# EAGLE board PCB (EAGLE 9.7.0)
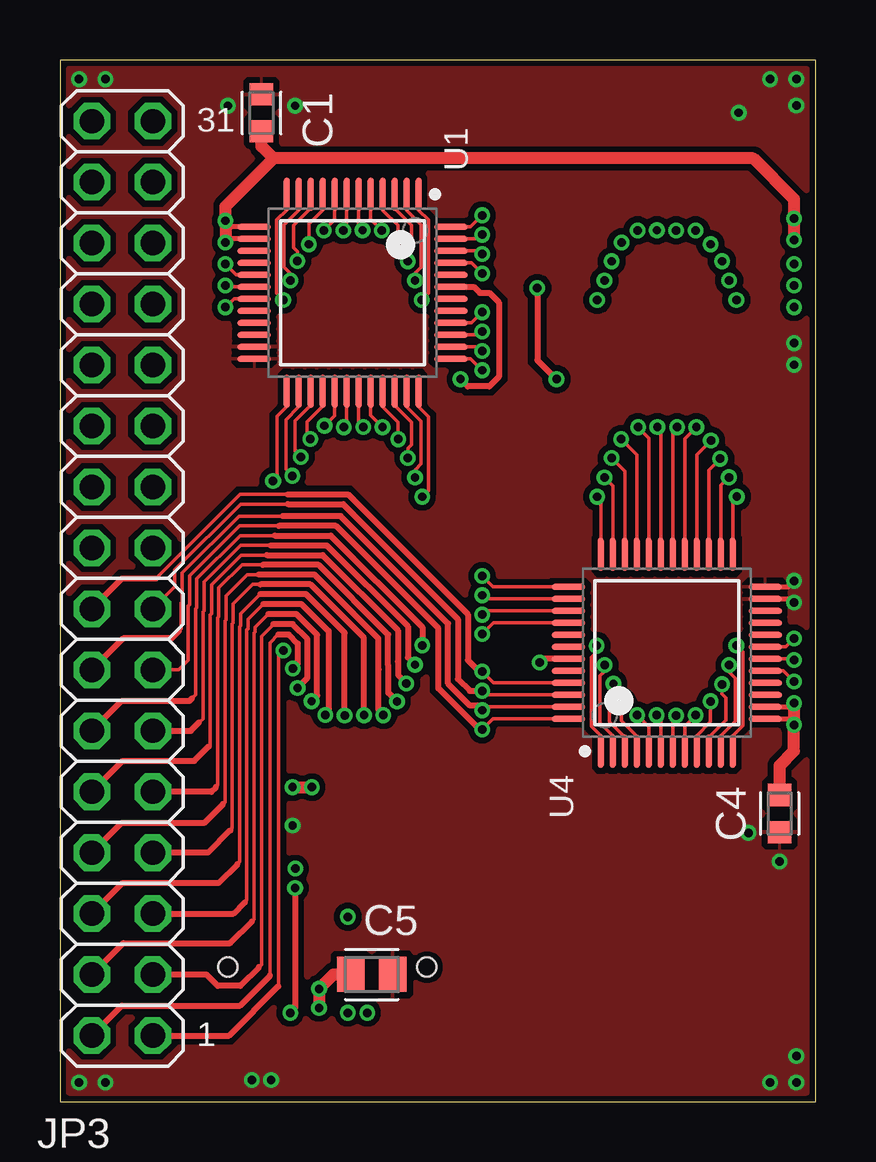
[diagram p0: board, top side]
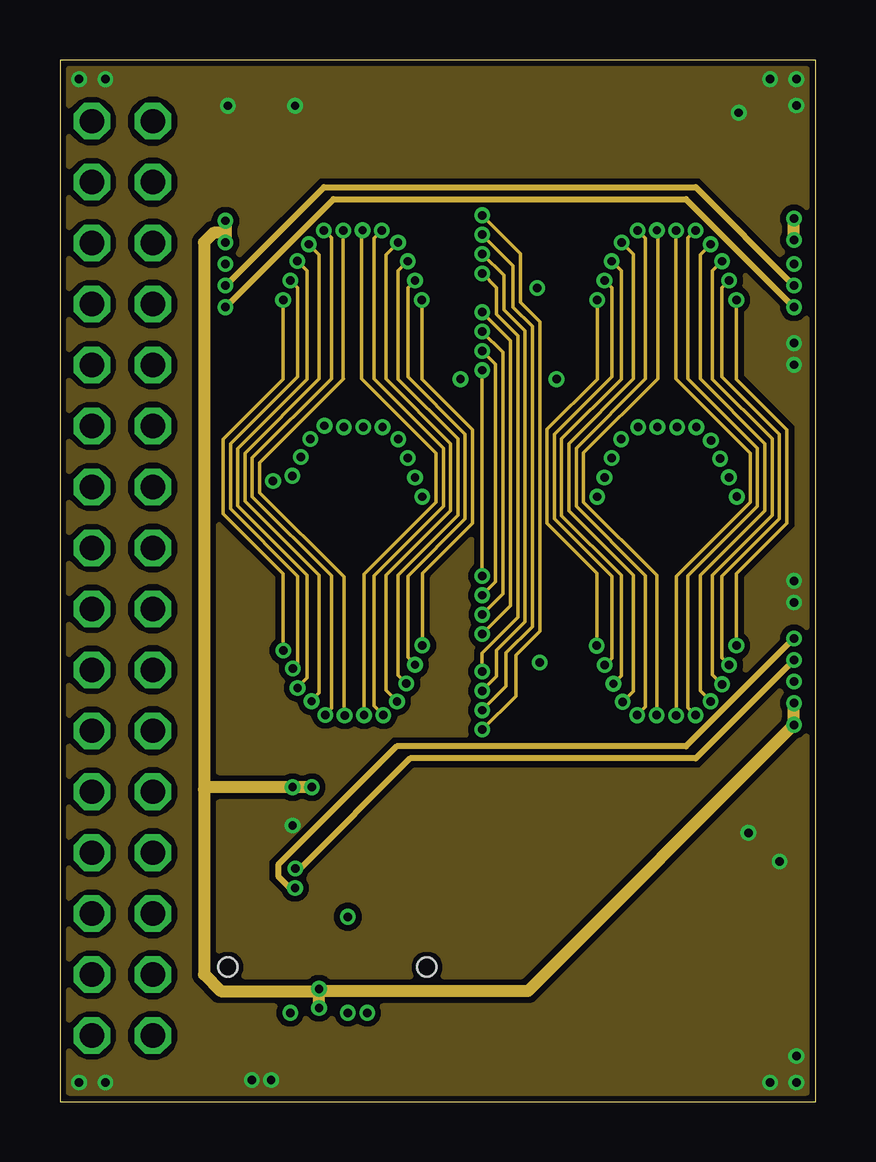
[diagram p1: board, inner layer Route2]
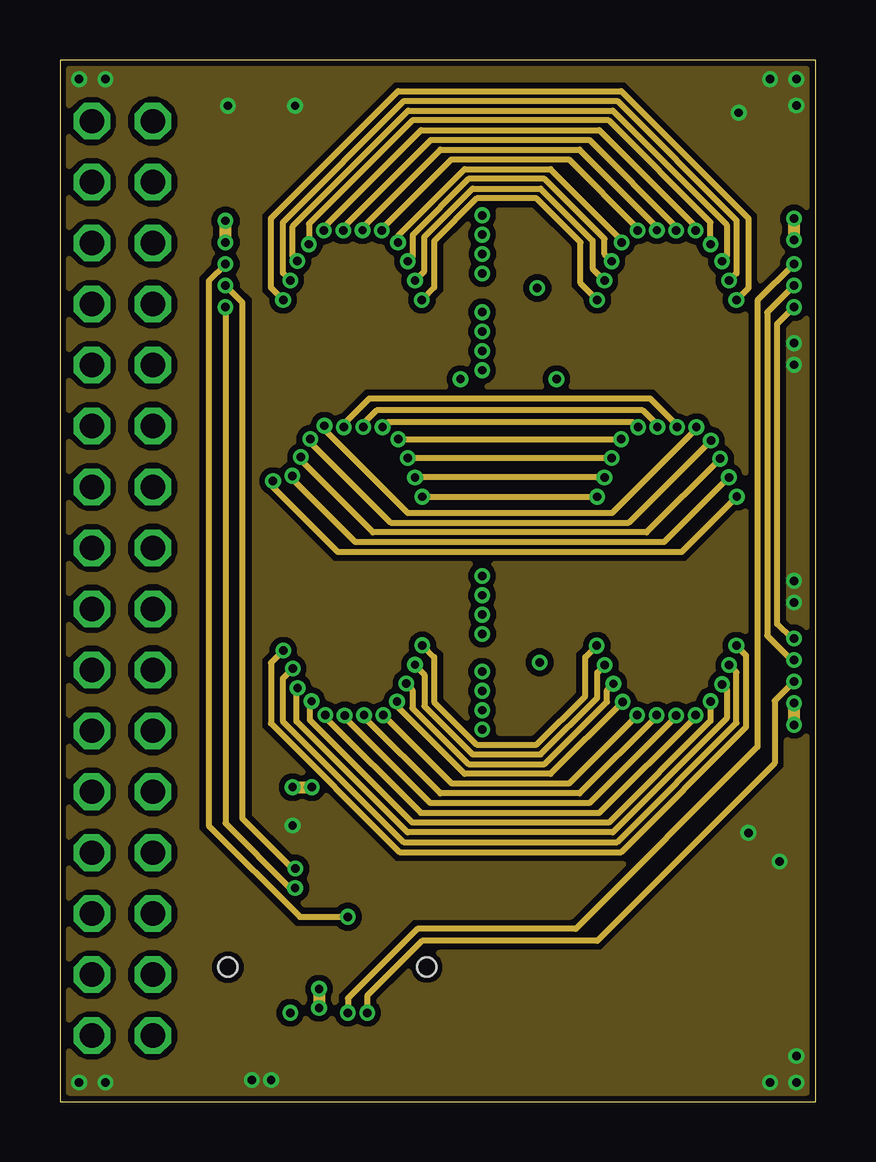
[diagram p2: board, inner layer Route15]
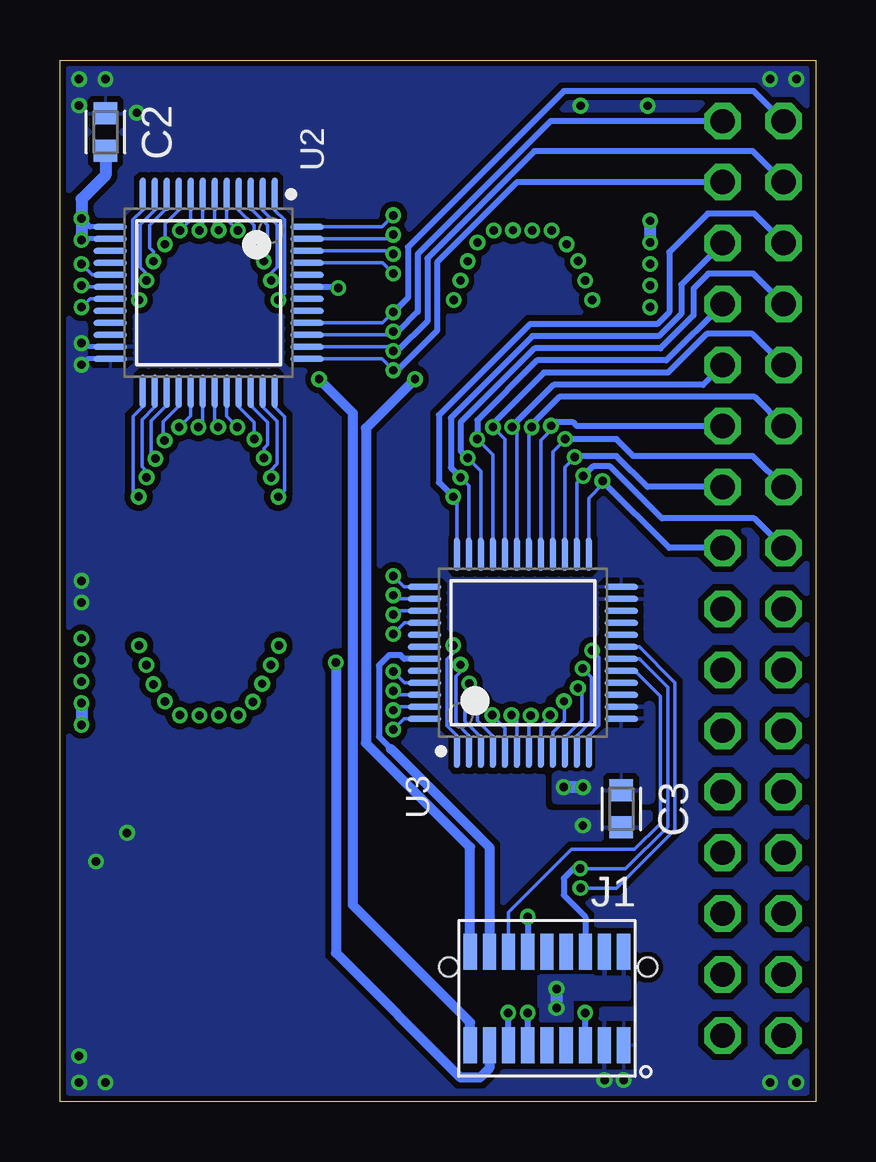
[diagram p3: board, bottom side, seen from below]

Size 31.5 x 43.4 mm. Coordinates in mm from the lower left corner, seen from the top.
Outline: 0,0 31.5,0 31.5,43.4 0,43.4 0,0
Copper layers (1+2*15+16): Top 0.035mm / dielectric 1.5mm / Route2 0.035mm / dielectric 0.15mm / Route15 0.035mm / dielectric 0.2mm / Bottom 0.035mm
Design rules "default *": minimum track width 6mil, minimum drill 0.35mm, track to track 6mil, track to pad 6mil, pad to pad 6mil, via to via 6mil, smd to smd 6mil, copper to edge 10mil, drill to drill 6mil, minimum pad ring 10mil, minimum via ring 6mil, stop-mask expansion 3mil, vias tented up to drill 15mil, thermal gap 10mil

## Footprints (pad centres in the part's own frame; a part is rotated, then mirrored left to right if it is on the bottom)
CAPC1608X85 = smd 0.921 x 0.97: 1 -0.775,0; 2 0.775,0
CAPC2012X110 = smd 1.165 x 1.465: 1 -0.875,0; 2 0.875,0
MOLEX_52465-1870 = smd 0.55 x 1.5: P$1 -3.2,1.95; P$2 -3.2,-1.95; P$3 -2.4,1.95; P$4 -2.4,-1.95; P$5 -1.6,1.95; P$6 -1.6,-1.95; P$7 -0.8,1.95; P$8 -0.8,-1.95; P$9 0,1.95; P$10 0,-1.95; P$11 0.8,1.95; P$12 0.8,-1.95; P$13 1.6,1.95; P$14 1.6,-1.95; P$15 2.4,1.95; P$16 2.4,-1.95; P$17 3.2,1.95; P$18 3.2,-1.95 | hole 0.8: -4.2,-1.3; 4.1,-1.3
2X16 = drill 1.016 octagon: 1 -19.05,-1.27; 2 -19.05,1.27; 3 -16.51,-1.27; 4 -16.51,1.27; 5 -13.97,-1.27; 6 -13.97,1.27; 7 -11.43,-1.27; 8 -11.43,1.27; 9 -8.89,-1.27; 10 -8.89,1.27; 11 -6.35,-1.27; 12 -6.35,1.27; 13 -3.81,-1.27; 14 -3.81,1.27; 15 -1.27,-1.27; 16 -1.27,1.27; 17 1.27,-1.27; 18 1.27,1.27; 19 3.81,-1.27; 20 3.81,1.27; 21 6.35,-1.27; 22 6.35,1.27; 23 8.89,-1.27; 24 8.89,1.27; 25 11.43,-1.27; 26 11.43,1.27; 27 13.97,-1.27; 28 13.97,1.27; 29 16.51,-1.27; 30 16.51,1.27; 31 19.05,-1.27; 32 19.05,1.27
ANALOG_DEVICES_ADG731BSUZ_0 = smd 1.4 x 0.25: 1 -4.1,2.75; 2 -4.1,2.25; 3 -4.1,1.75; 4 -4.1,1.25; 5 -4.1,0.75; 6 -4.1,0.25; 7 -4.1,-0.25; 8 -4.1,-0.75; 9 -4.1,-1.25; 10 -4.1,-1.75; 11 -4.1,-2.25; 12 -4.1,-2.75; 25 4.1,-2.75; 26 4.1,-2.25; 27 4.1,-1.75; 28 4.1,-1.25; 29 4.1,-0.75; 30 4.1,-0.25; 31 4.1,0.25; 32 4.1,0.75; 33 4.1,1.25; 34 4.1,1.75; 35 4.1,2.25; 36 4.1,2.75 | smd 0.25 x 1.4: 13 -2.75,-4.1; 14 -2.25,-4.1; 15 -1.75,-4.1; 16 -1.25,-4.1; 17 -0.75,-4.1; 18 -0.25,-4.1; 19 0.25,-4.1; 20 0.75,-4.1; 21 1.25,-4.1; 22 1.75,-4.1; 23 2.25,-4.1; 24 2.75,-4.1; 37 2.75,4.1; 38 2.25,4.1; 39 1.75,4.1; 40 1.25,4.1; 41 0.75,4.1; 42 0.25,4.1; 43 -0.25,4.1; 44 -0.75,4.1; 45 -1.25,4.1; 46 -1.75,4.1; 47 -2.25,4.1; 48 -2.75,4.1

## Placement (x,y rotation side)
C1  0.1uF  [CAPC1608X85]  8.4,41.2 270 top
C2  0.1uF  [CAPC1608X85]  29.6,40.4 270 bottom
C3  0.1uF  [CAPC1608X85]  8.1,12.2 90 bottom
C4  0.1uF  [CAPC1608X85]  30,12 90 top
C5  10uF  [CAPC2012X110]  13,5.3 180 top
J1  MOLEX_52465-1870  [MOLEX_52465-1870]  11.2,4.3 180 bottom
JP3  PINHD-2X16  [2X16]  2.6,21.8 90 top
U1  ANALOG_DEVICES_ADG731BSUZANALOG_DEVICES_ADG731BSUZ_0_0  [ANALOG_DEVICES_ADG731BSUZ_0]  12.2,33.7 270 top
U2  ANALOG_DEVICES_ADG731BSUZANALOG_DEVICES_ADG731BSUZ_0_0  [ANALOG_DEVICES_ADG731BSUZ_0]  25.3,33.7 270 bottom
U3  ANALOG_DEVICES_ADG731BSUZANALOG_DEVICES_ADG731BSUZ_0_0  [ANALOG_DEVICES_ADG731BSUZ_0]  12.2,18.7 90 bottom
U4  ANALOG_DEVICES_ADG731BSUZANALOG_DEVICES_ADG731BSUZ_0_0  [ANALOG_DEVICES_ADG731BSUZ_0]  25.3,18.7 90 top

## Library data of the parts
C1-C5 = Capacitor; CATEGORY: Capacitor
J1 = Molex 52465-1870
JP3 = Connector
U1-U4 = Analog Devices - ADG731BSUZ; BANDWIDTH_HZ: 18M; CIIVA_IDS: 19300650; CODE__JEDEC: MS-026ABC; COMPONENT_LINK_1_DESCRIPTION: Manufacturer URL; COMPONENT_LINK_1_URL: http://www.analog.com/en/index.html; COMPONENT_LINK_3_DESCRIPTION: Package Specification; COMPONENT_LINK_3_URL: http://www.analog.com/static/imported-files/packages/470644706845302410119987SU48_7x7.pdf; DATASHEET: http://www.analog.com/static/imported-files/data_sheets/ADG725_731.pdf; DATASHEET_VERSION: Rev. A; FOOTPRINT_VARIANT_NAME_0: Level C; FOOTPRINT_VARIANT_NAME_1: Level B; FOOTPRINT_VARIANT_NAME_2: Level A; IMPORTED: yes; IMPORTED_FROM: vault; IMPORT_TS: 1521857462; MAX_ANALOG_SIGNAL_RANGE: Vss to Vdd; MF: Analog Devices; MOUNTING_TECHNOLOGY: Surface Mount; MPN: ADG731BSUZ; PACKAGE: SU-48; PACKAGE_DESCRIPTION: 48-Pin Thin Plastic Quad Flat Package, Body 7 x 7 mm, Pitch 0.5 mm; PACKING: Tray; PIN_0_0_39_INSIDE_EDGE: clock; PREFIX: U; RELEASE_DATE: 1391089390; RON_OHMS: 4; SUPPLY_V_GUAR_PERFORMANCE: Dual_(+/-2.5V), Single_(+3V), Single_(+5V); T_TRANSITION_S: 42n; VAULT_GUID: 76926279-8684-441A-80C4-6DFBDCC65274; VAULT_REVISION: 8C21F4D2-BBAB-4E50-B4EF-AC8EEE00B0BF

## Nets
+5V: C1.2 C2.2 C3.2 C4.2 C5.2 J1.P$2 J1.P$4 U1.13 U1.14 U2.13 U2.14 U3.13 U3.14 U4.13 U4.14
CS5: J1.P$14 U3.17
CS6: J1.P$12 U1.17
CS7: J1.P$13 U4.17
CS8: J1.P$11 U2.17
D1: J1.P$16 U3.43
D2: J1.P$18 U1.43
D3: J1.P$15 U4.43
D4: J1.P$17 U2.43
DAT: J1.P$6 U1.18 U2.18 U3.18 U4.18
GND: C1.1 C2.1 C3.1 C4.1 C5.1 J1.P$1 J1.P$3 U1.23 U1.24 U2.23 U2.24 U3.23 U3.24 U4.23 U4.24
S1: JP3.1 U1.12 U2.12 U3.12 U4.12
S2: JP3.2 U1.11 U2.11 U3.11 U4.11
S3: JP3.3 U1.10 U2.10 U3.10 U4.10
S4: JP3.4 U1.9 U2.9 U3.9 U4.9
S5: JP3.5 U1.8 U2.8 U3.8 U4.8
S6: JP3.6 U1.7 U2.7 U3.7 U4.7
S7: JP3.7 U1.6 U2.6 U3.6 U4.6
S8: JP3.8 U1.5 U2.5 U3.5 U4.5
S9: JP3.9 U1.4 U2.4 U3.4 U4.4
S10: JP3.10 U1.3 U2.3 U3.3 U4.3
S11: JP3.11 U1.2 U2.2 U3.2 U4.2
S12: JP3.12 U1.1 U2.1 U3.1 U4.1
S13: JP3.13 U1.48 U2.48 U3.48 U4.48
S14: JP3.14 U1.47 U2.47 U3.47 U4.47
S15: JP3.15 U1.46 U2.46 U3.46 U4.46
S16: JP3.16 U1.45 U2.45 U3.45 U4.45
S17: JP3.17 U1.25 U2.25 U3.25 U4.25
S18: JP3.18 U1.26 U2.26 U3.26 U4.26
S19: JP3.19 U1.27 U2.27 U3.27 U4.27
S20: JP3.20 U1.28 U2.28 U3.28 U4.28
S21: JP3.21 U1.29 U2.29 U3.29 U4.29
S22: JP3.22 U1.30 U2.30 U3.30 U4.30
S23: JP3.23 U1.31 U2.31 U3.31 U4.31
S24: JP3.24 U1.32 U2.32 U3.32 U4.32
S25: JP3.25 U1.33 U2.33 U3.33 U4.33
S26: JP3.26 U1.34 U2.34 U3.34 U4.34
S27: JP3.27 U1.35 U2.35 U3.35 U4.35
S28: JP3.28 U1.36 U2.36 U3.36 U4.36
S29: JP3.29 U1.37 U2.37 U3.37 U4.37
S30: JP3.30 U1.38 U2.38 U3.38 U4.38
S31: JP3.31 U1.39 U2.39 U3.39 U4.39
S32: JP3.32 U1.40 U2.40 U3.40 U4.40
SCLK: J1.P$5 U1.19 U2.19 U3.19 U4.19

## Tracks (layer width: path | path; a pad name or v marks a point on that pad's centre or on a via)
+5V  (via drill 0.35)
  Top 0.203: U1.14 7.05,35.95 v6.9,35.8 | U1.13 7.15,36.45 v6.9,36.7 | U4.14 30.45,16.45 v30.6,16.6 | U4.13 30.35,15.95 v30.6,15.7
  Top 0.508: 8.9,39.3 6.9,37.3 v6.9,36.7 v6.9,35.8 | 8.9,39.3 28.9,39.3 30.6,37.6 v30.6,36.8 v30.6,35.9 | C4.2 30,14 30.6,14.6 v30.6,15.7 v30.6,16.6 | v9.7,13.1 v10.5,13.1 | v10.8,3.9 v10.8,4.7 11.4,5.3 C5.2 | 8.9,39.3 8.4,39.8 C1.2
  Route2 0.508: v6.9,36.7 6.9,36.2 | 6.9,36.2 v6.9,35.8 | v30.6,16.6 v30.6,15.7 19.5,4.6 10.9,4.6 v10.8,4.7 | v30.6,35.9 v30.6,36.8 | v10.8,3.9 v10.8,4.7 | 6.9,36.2 6.4,36.2 6,35.8 6,13 | 6,13 6,5.3 6.7,4.6 10.7,4.6 v10.8,4.7 | v10.5,13.1 v9.7,13.1 6.1,13.1 6,13
  Route15 0.508: v6.9,35.8 v6.9,36.7 | v30.6,36.8 v30.6,35.9 | v30.6,16.6 v30.6,15.7 | v10.8,4.7 v10.8,3.9 | v9.7,13.1 v10.5,13.1
  Bottom 0.203: U2.14 30.55,35.95 v30.6,35.9 | U2.13 30.25,36.45 v30.6,36.8
  Bottom 0.508: C2.2 29.6,38.6 30.6,37.6 v30.6,36.8 v30.6,35.9 | v6.9,36.7 v6.9,35.8 | v30.6,16.6 v30.6,15.7 | v10.8,4.7 v10.8,3.9 | v9.7,13.1 v10.5,13.1
  pour Bottom: 11,12.4 11,16.7 6.7,16.7 6.7,12.4
  pour Bottom: 7.7,7 9.2,7 9.2,5.3 11.6,5.3 11.6,3.3 10.1,3.3 10.1,4.2 7.7,4.2
CS5
  Bottom 0.152: U3.17 7.53,17.95 6.47,16.9 6.47,11.59 7.54,10.51 10.17,10.51 12.8,7.89 J1.P$14
CS6  (via drill 0.35, 0.35 pad 0.55)
  Top 0.152: U1.17 7.35,34.45 v6.9,34.9
  Route15 0.254: v6.9,34.9 6.2,34.2 6.2,11.5 10,7.7 v12,7.7
  Bottom 0.254: v12,7.7 J1.P$12
CS7  (via drill 0.35, 0.35 pad 0.55)
  Top 0.152: v30.6,17.5 30.15,17.95 U4.17
  Route15 0.254: v30.6,17.5 29.8,16.7 29.8,14.1 22.4,6.7 15.1,6.7 12.81,4.41 v12.81,3.7
  Bottom 0.254: J1.P$13 v12.8,3.69 v12.81,3.7
CS8  (via drill 0.35, 0.35 pad 0.55)
  Route15 0.254: v30.6,34.9 29.08,33.38 29.08,14.78 21.5,7.2 14.9,7.2 12,4.3 v12,3.7
  Bottom 0.152: v30.6,34.9 30.15,34.45 U2.17
  Bottom 0.254: J1.P$11 v12,3.7
D1
  Bottom 0.254: U3.43 17.15,18.45 17.3,18.6 17.78,18.6 18.21,18.17 18.21,15.21 17.7,14.7
  Bottom 0.406: 17.7,14.7 13.6,10.6 J1.P$16
D2  (via drill 0.35)
  Top 0.254: U1.43 17.25,33.95 17.5,33.7 17.9,33.7 18.3,33.3 18.3,30.2 17.9,29.8 17,29.8 v16.7,30.1
  Bottom 0.406: v16.7,30.1 18.74,28.06 18.74,14.94 14.4,10.6 J1.P$18
D3  (via drill 0.35)
  Top 0.254: U4.43 20.15,18.45 v20,18.3
  Bottom 0.406: v20,18.3 20,6.2 14.8,1 14,1 13.6,1.4 J1.P$15
D4  (via drill 0.35)
  Top 0.254: v19.9,33.9 19.9,30.9 v20.7,30.1
  Bottom 0.254: U2.43 19.95,33.95 v19.9,33.9
  Bottom 0.406: v20.7,30.1 19.3,28.7 19.3,8.2 14.4,3.3 J1.P$17
DAT  (via drill 0.35, 0.35 pad 0.55)
  Top 0.152: U4.18 30.55,18.45 v30.6,18.4 | U1.18 6.95,33.95 v6.9,34
  Route2 0.254: v6.9,34 11,38.1 26.5,38.1 v30.6,34 | v30.6,18.4 26.5,14.3 14.6,14.3 10.01,9.71 v9.81,9.71
  Route15 0.254: v6.9,34 7.6,33.3 7.6,11.8 9.69,9.71 v9.81,9.71 | v30.6,34 29.49,32.89 29.49,19.41 30.5,18.4 v30.6,18.4
  Bottom 0.152: U2.18 30.55,33.95 v30.6,34 | U3.18 7.35,18.45 6.17,17.27 6.17,11.46 7.92,9.71 v9.81,9.71
  Bottom 0.254: v9.81,9.71 10.09,9.71 10.5,9.3 10.5,8.6 9.6,7.7 J1.P$6
GND  (via drill 0.35)
  Top 0.203: U4.23 30.45,20.95 v30.6,20.8 | U4.24 30.35,21.45 v30.6,21.7
  Bottom 0.203: U2.23 30.45,31.45 v30.6,31.6 | U2.24 30.35,30.95 v30.6,30.7
  other vias: 30,10 28.7,11.2 29.6,42.6 28.3,41.2 30.7,0.8 30.7,1.9 29.6,0.8 30.7,42.6 30.7,41.5 7,41.49 9.8,41.49 0.8,0.8 1.9,0.8 0.8,42.6 1.9,42.6 8,0.9 8.8,0.9 9.7,11.5
  pour Top (isolate 0.254, rank 2): 0,0 31.5,0 31.5,43.4 0,43.4
  pour Route2 (isolate 0.254): 0,0 31.5,0 31.5,43.4 0,43.4
  pour Route15 (isolate 0.254): 0,0 31.5,0 31.5,43.4 0,43.4
  pour Bottom (isolate 0.254, rank 2): 0,0 31.5,0 31.5,43.4 0,43.4
S1  (via drill 0.35 pad 0.55)
  Top 0.152: U1.12 9.45,37.15 9.04,36.74 9.04,33.67 v9.3,33.41 | U4.12 28.05,15.25 28.46,15.66 28.46,18.74 v28.2,19 | v9.31,18.79 9.11,18.59 9.11,4.81 9.1,4.8
  Top 0.254: JP3.1 7.05,2.75 9.1,4.8
  Route2 0.152: v28.2,33.4 28.2,30.1 30.3,28 30.3,24.1 28.2,22 v28.2,19 | v9.3,33.41 v9.3,33.4 9.3,30.1 6.8,27.6 6.8,24.5 9.31,21.99 v9.31,18.79
  Route15 0.254: v9.3,33.41 8.8,33.91 8.8,36.8 14.1,42.1 23.4,42.1 28.7,36.8 28.7,33.9 v28.2,33.4 | v28.2,19 28.61,18.59 28.61,15.61 23.4,10.4 14.16,10.4 8.8,15.76 8.8,18.28 v9.31,18.79
  Bottom 0.152: U3.12 9.45,15.25 9.03,15.67 9.03,18.51 v9.31,18.79 | U2.12 28.05,37.15 28.46,36.74 28.46,33.66 v28.2,33.4
S2  (via drill 0.35 pad 0.55)
  Top 0.152: U1.11 9.95,37.15 9.34,36.54 9.34,34.77 9.6,34.51 v9.6,34.21 | U4.11 27.55,15.25 28.16,15.86 28.16,17.63 27.9,17.89 v27.9,18.19 | 8.75,5.25 8.75,19.12 9.1,19.47
  Top 0.254: 9.1,19.47 9.53,19.47 9.92,19.08 9.92,18.26 v9.7,18.05 | JP3.2 2.58,4 7.5,4 8.75,5.25
  Route2 0.152: v9.6,34.21 9.9,33.91 9.9,30.2 7.11,27.41 7.11,24.69 9.9,21.9 9.9,18.3 9.7,18.1 v9.7,18.05 | v27.9,18.19 27.6,18.49 27.6,21.9 29.99,24.3 29.99,27.8 27.6,30.2 27.6,33.91 v27.9,34.21
  Route15 0.254: v27.9,18.19 28.21,17.89 28.21,15.78 23.23,10.81 14.33,10.81 9.28,15.85 9.28,17.62 v9.7,18.05 | v9.6,34.21 9.29,34.52 9.29,36.64 14.35,41.69 23.23,41.69 28.21,36.72 28.21,34.51 v27.9,34.21
  Bottom 0.152: U3.11 9.95,15.25 9.33,15.87 9.33,17.67 v9.7,18.05 | U2.11 27.55,37.15 28.16,36.54 28.16,34.77 27.9,34.51 v27.9,34.21
S3  (via drill 0.35 pad 0.55)
  Top 0.152: U1.10 10.45,37.22 9.74,36.51 9.74,35.57 9.9,35.41 v9.9,35.02 | U4.10 27.05,15.18 27.76,15.89 27.76,16.83 27.6,16.99 v27.6,17.39 | 8.9,19.9 8.4,19.4 8.4,5.7 8.3,5.6
  Top 0.254: 8.9,19.9 9.7,19.9 10.32,19.28 10.32,17.65 v9.91,17.24 | 8.9,19.9 | JP3.3 6.11,5.29 6.58,4.82 7.52,4.82 8.3,5.6
  Route2 0.152: v9.9,35.02 v9.9,35.01 10.3,34.61 10.3,30.11 7.41,27.21 7.41,24.82 10.3,21.93 10.3,17.66 9.91,17.27 v9.91,17.24 | v27.6,17.39 27.2,17.79 27.2,21.93 29.69,24.42 29.69,27.61 27.2,30.11 27.2,34.61 v27.6,35.01
  Route15 0.254: v27.6,17.39 27.8,17.19 27.8,15.97 23.05,11.21 14.5,11.21 9.86,15.84 9.86,17.2 v9.91,17.24 | v9.9,35.02 9.7,35.22 9.7,36.47 14.52,41.29 23.05,41.29 27.8,36.53 27.8,35.21 v27.6,35.01
  Bottom 0.152: U3.10 10.45,15.18 9.74,15.89 9.74,17.07 v9.91,17.24 | U2.10 27.05,37.22 27.76,36.51 27.76,35.57 27.6,35.41 v27.6,35.01
S4  (via drill 0.35 pad 0.55)
  Top 0.152: U1.9 10.95,37.15 10.38,36.58 v10.38,35.72 | U4.9 26.55,15.25 27.12,15.82 v27.12,16.68 | 8.69,20.32 8.14,19.77 8.14,19.57 8.1,19.53 8.1,7.59 8,7.5
  Top 0.254: 8.69,20.32 9.86,20.32 10.73,19.45 10.73,16.92 v10.49,16.68 | JP3.4 2.64,6.6 7.1,6.6 8,7.5
  Route2 0.152: v10.38,35.72 10.81,35.29 10.81,30.11 7.72,27.02 7.72,25.02 10.81,21.92 10.81,17.03 10.49,16.71 v10.49,16.68 | v27.12,16.68 26.69,17.11 26.69,21.92 29.39,24.62 29.39,27.41 26.69,30.11 26.69,35.29 v27.12,35.72
  Route15 0.254: v27.12,16.68 27.12,15.86 22.88,11.62 14.69,11.62 10.42,15.89 10.42,16.61 v10.49,16.68 | v10.38,35.72 10.38,36.57 14.69,40.88 22.88,40.88 27.12,36.64 v27.12,35.72
  Bottom 0.152: U2.9 26.55,37.15 27.12,36.58 v27.12,35.72 | U3.9 10.95,15.4 10.47,15.87 10.47,16.66 v10.49,16.68
S5  (via drill 0.35 pad 0.55)
  Top 0.152: U1.8 11.45,36.75 v11,36.3 | U4.8 26.05,15.65 v26.5,16.1 | 8.47,20.73 7.84,20.1 7.84,19.7 7.79,19.65 7.79,8.39 7.7,8.3
  Top 0.254: 8.47,20.73 10.07,20.73 11.2,19.6 11.2,16.25 v11.06,16.11 | JP3.5 7.23,7.83 7.7,8.3
  Route2 0.152: v26.5,16.1 26.19,16.41 26.19,21.92 29.08,24.81 29.08,27.22 26.19,30.11 26.19,35.99 v26.5,36.3 | v11,36.3 11.31,35.99 11.31,30.11 8.02,26.82 8.02,25.21 11.31,21.92 11.31,16.39 11.06,16.14 v11.06,16.11
  Route15 0.254: v26.5,16.1 26.5,16.04 22.48,12.03 15.05,12.03 11.06,16.01 v11.06,16.11 | v11,36.3 11,36.42 15.05,40.47 22.48,40.47 26.5,36.46 v26.5,36.3
  Bottom 0.152: U2.8 26.05,36.75 v26.5,36.3 | U3.8 11.45,15.68 11.06,16.07 v11.06,16.11
S6  (via drill 0.35 pad 0.55)
  Top 0.152: U1.7 11.95,36.44 v11.81,36.3 | U4.7 25.55,15.95 v25.69,16.09 | 8.35,21.15 7.53,20.33 7.53,19.83 7.49,19.78 7.49,9.99 7.4,9.9
  Top 0.254: v11.87,16.09 11.87,19.53 10.25,21.15 8.35,21.15 | JP3.6 2.6,9.1 6.6,9.1 7.4,9.9
  Route2 0.152: v25.69,16.09 25.69,21.89 28.78,24.98 28.78,27.02 25.68,30.12 25.68,36.29 v25.69,36.3 | v11.81,36.3 11.81,30.13 11.82,30.12 8.32,26.62 8.32,25.37 11.84,21.86 11.84,16.12 v11.87,16.09
  Route15 0.254: v25.69,16.09 25.69,16.06 22.07,12.43 15.45,12.43 11.87,16.02 v11.87,16.09 | v11.81,36.3 11.81,36.41 15.46,40.07 22.07,40.07 25.69,36.44 v25.69,36.3
  Bottom 0.152: U2.7 25.55,36.45 v25.69,36.31 v25.69,36.3 | U3.7 11.95,15.98 11.87,16.06 v11.87,16.09
S7  (via drill 0.35 pad 0.55)
  Top 0.152: U4.6 25.05,15.93 v24.88,16.1 | U1.6 12.45,36.47 v12.61,36.31 | 7.1,11.3 7.18,11.38 7.18,19.91 7.23,19.95 7.23,20.75 8.03,21.55 8.36,21.55
  Top 0.254: v12.68,16.1 12.68,19.32 10.45,21.55 8.36,21.55 | JP3.7 6.17,10.37 7.1,11.3
  Route2 0.152: v12.61,36.31 12.58,36.27 12.58,30.12 15.68,27.02 15.68,24.98 12.68,21.98 v12.68,16.1 | v24.88,16.1 24.88,21.93 21.83,24.97 21.83,27.03 24.92,30.12 24.92,36.27 v24.89,36.31
  Route15 0.254: v24.88,16.1 24.88,16.05 21.66,12.84 15.86,12.84 12.68,16.02 v12.68,16.1 | v12.61,36.31 12.61,36.41 15.86,39.66 21.66,39.66 24.89,36.44 v24.89,36.31
  Bottom 0.152: U2.6 25.05,36.47 v24.89,36.31 | U3.6 12.45,15.87 v12.68,16.1
S8  (via drill 0.35 pad 0.55)
  Top 0.152: U1.5 12.95,36.77 v13.42,36.3 | v24.07,16.1 24.55,15.62 U4.5 | 8.29,21.96 7.81,21.96 6.92,21.08 6.92,20.08 6.88,20.03 6.88,12.48 6.8,12.4
  Top 0.254: v13.48,16.1 13.29,16.3 13.29,18 13.28,18 13.28,19.29 10.61,21.96 8.29,21.96 | JP3.8 2.56,11.6 6,11.6 6.8,12.4
  Route2 0.152: v13.42,36.3 13.09,35.96 13.09,30.11 15.98,27.22 15.98,24.81 13.09,21.92 13.09,16.5 v13.48,16.1 | v24.07,16.1 24.41,16.45 24.41,21.92 21.52,24.81 21.52,27.22 24.41,30.11 24.41,35.96 v24.08,36.3
  Route15 0.254: v24.07,16.1 21.21,13.24 16.34,13.24 v13.48,16.1 | v13.42,36.3 13.42,36.36 16.31,39.26 21.21,39.26 24.08,36.39 v24.08,36.3
  Bottom 0.152: U2.5 24.55,36.77 v24.08,36.3 | U3.5 12.95,15.57 v13.48,16.1
S9  (via drill 0.35 pad 0.55)
  Top 0.152: U1.4 13.45,37.15 14.09,36.51 v14.09,35.8 | U4.4 24.05,15.23 23.41,15.87 23.41,16.61 v23.46,16.66 | 8.46,22.37 7.59,22.37 6.62,21.4 6.62,20.2 6.57,20.16 6.57,13.17 6.5,13.1
  Top 0.254: v14.05,16.67 13.69,17.03 13.69,18.16 13.69,18.17 13.69,19.46 10.78,22.37 8.46,22.37 | JP3.9 6.31,12.91 6.5,13.1
  Route2 0.152: v23.46,16.66 23.91,17.11 23.91,21.92 21.22,24.61 21.22,27.42 23.91,30.11 23.91,35.3 v23.41,35.8 | v14.05,16.67 13.59,17.14 13.59,21.92 16.29,24.62 16.29,27.41 13.59,30.11 13.59,35.29 v14.09,35.79 v14.09,35.8
  Route15 0.254: v23.46,16.66 20.45,13.65 16.87,13.65 14.05,16.46 v14.05,16.67 | v23.41,35.8 23.41,35.89 20.45,38.85 16.87,38.85 14.1,36.08 v14.1,35.81 v14.09,35.8
  Bottom 0.152: U3.4 13.45,15.23 14.09,15.87 14.09,16.63 v14.05,16.67 | U2.4 24.05,37.15 23.41,36.51 v23.41,35.8
S10  (via drill 0.35 pad 0.55)
  Top 0.152: U1.3 13.95,37.22 14.66,36.51 14.66,35.57 14.5,35.41 v14.5,35.01 | U4.3 23.55,15.18 22.91,15.83 22.91,16.99 23.07,17.16 v23.07,17.41 | 8.63,22.77 7.56,22.77 6.31,21.53 6.31,20.33 6.27,20.28 6.27,14.87 6.2,14.8
  Top 0.254: v14.44,17.43 14.1,17.77 14.1,18.33 14.09,18.34 14.09,19.63 10.95,22.77 8.63,22.77 | JP3.10 2.62,14.2 5.6,14.2 6.2,14.8
  Route2 0.152: v14.5,35.01 14.09,34.61 14.09,30.11 16.59,27.61 16.59,24.42 14.09,21.93 14.09,17.77 v14.44,17.43 | v23.07,17.41 23.41,17.74 23.41,21.93 20.91,24.42 20.91,27.61 23.41,30.11 23.41,34.61 v23,35.01
  Route15 0.254: v23.07,17.41 22.81,17.14 22.81,16.66 20.21,14.06 17.04,14.06 14.69,16.4 14.69,17.14 14.44,17.4 v14.44,17.43 | v14.5,35.01 14.7,35.21 14.7,36.11 17.04,38.44 20.21,38.44 22.7,35.95 22.7,35.31 v23,35.01
  Bottom 0.152: U3.3 13.95,15.18 14.61,15.84 14.61,16.9 14.44,17.07 v14.44,17.43 | U2.3 23.55,37.22 22.84,36.51 22.84,35.57 23,35.41 v23,35.01
S11  (via drill 0.35 pad 0.55)
  Top 0.152: U1.2 14.45,37.15 15.06,36.54 15.06,34.77 14.8,34.51 v14.8,34.21 | U4.2 23.05,15.25 22.52,15.78 22.52,17.74 22.71,17.93 v22.71,18.19 | 8.79,23.18 7.54,23.18 6.01,21.65 6.01,20.46 5.96,20.41 5.96,15.96 5.8,15.8
  Top 0.254: v14.8,18.2 14.5,18.51 14.5,19.8 11.12,23.18 8.79,23.18 | JP3.11 5.45,15.45 5.8,15.8
  Route2 0.152: v14.8,34.21 14.5,33.91 14.5,30.2 16.89,27.8 16.89,24.3 14.5,21.9 14.5,18.51 v14.8,18.2 | v22.71,18.19 23,18.48 23,21.9 20.61,24.29 20.61,27.81 23,30.2 23,33.91 v22.7,34.21
  Route15 0.254: v22.71,18.19 22.4,17.88 22.4,16.82 20.04,14.46 17.2,14.46 15.19,16.47 15.19,17.79 14.8,18.18 v14.8,18.2 | v14.8,34.21 15.19,34.6 15.19,36.03 17.2,38.04 20.04,38.04 22.2,35.88 22.2,34.71 v22.7,34.21
  Bottom 0.152: U3.2 14.45,15.25 15,15.8 15,17.73 14.8,17.92 v14.8,18.2 | U2.2 23.05,37.15 22.44,36.54 22.44,34.77 22.7,34.51 v22.7,34.21
S12  (via drill 0.35 pad 0.55)
  Top 0.152: U1.1 14.95,37.15 15.36,36.74 15.36,33.67 v15.09,33.4 | U4.1 22.55,15.25 22.15,15.65 22.15,18.52 22.38,18.75 v22.38,19 | 8.96,23.59 7.51,23.59 5.71,21.78 5.71,20.58 5.66,20.54 5.66,16.96 5.5,16.8
  Top 0.254: v15.11,19.01 15.11,19.77 11.29,23.59 8.96,23.59 | JP3.12 2.58,16.7 5.4,16.7 5.5,16.8
  Route2 0.152: v22.38,19 22.38,22.02 20.3,24.09 20.3,28 22.4,30.1 v22.4,33.4 | v15.09,33.4 15.1,33.39 15.1,30.1 17.2,28 17.2,24.1 15.11,22.01 v15.11,19.01
  Route15 0.254: v22.38,19 21.9,18.52 21.9,16.9 19.87,14.87 17.37,14.87 15.6,16.64 15.6,18.52 v15.11,19.01 | v22.4,33.4 21.7,34.1 21.7,35.8 19.87,37.63 17.37,37.63 15.6,35.86 15.6,33.91 v15.09,33.4
  Bottom 0.152: U3.1 14.95,15.25 15.36,15.66 15.36,18.43 15.11,18.69 v15.11,19.01 | U2.1 22.55,37.15 22.14,36.74 22.14,33.66 v22.4,33.4
S13  (via drill 0.35 pad 0.55)
  Top 0.152: U4.48 18.05,15.95 v17.6,15.5 | U1.48 17.12,36.45 v17.6,36.93 | 9.13,23.99 7.49,23.99 5.4,21.91 5.4,20.71 5.35,20.66 5.35,18.4 4.94,17.99 JP3.13
  Top 0.254: v17.6,15.5 17.5,15.5 15.78,17.22 15.78,19.72 11.51,23.99 9.13,23.99
  Route2 0.152: v17.6,15.5 19,16.9 19,18.6 20,19.6 20,32.5 19.2,33.3 19.2,35.33 v17.6,36.93
  Bottom 0.152: U3.48 17.15,15.95 v17.6,15.5 | U2.48 18.08,36.45 v17.6,36.93
S14  (via drill 0.35 pad 0.55)
  Top 0.152: U4.47 17.74,16.45 v17.6,16.31 | U1.47 17.43,35.95 v17.6,36.12 | 9.3,24.4 7.46,24.4 5.1,22.03 5.1,20.84 5.05,20.79 5.05,19.7 4.95,19.6
  Top 0.254: v17.6,16.31 17.41,16.5 17.1,16.5 16.19,17.41 16.19,19.91 11.7,24.4 9.3,24.4 | JP3.14 2.64,19.3 4.65,19.3 4.95,19.6
  Route2 0.152: v17.6,16.31 18.6,17.31 18.6,18.7 19.7,19.8 19.7,32.3 18.89,33.1 18.89,34.83 v17.6,36.12
  Bottom 0.152: U3.47 17.46,16.45 v17.6,16.31 | U2.47 17.77,35.95 v17.6,36.12
S15  (via drill 0.35 pad 0.55)
  Top 0.152: U4.46 17.76,16.95 v17.6,17.11 | U1.46 17.47,35.45 v17.61,35.31 | 9.5,24.89 7.53,24.89 4.79,22.16 4.79,21.45 JP3.15
  Top 0.254: v17.6,17.11 17.09,17.11 16.59,17.61 16.59,20.11 11.81,24.89 9.5,24.89
  Route2 0.152: v17.6,17.11 18.2,17.71 18.2,18.8 19.39,19.99 19.39,32.11 18.5,33 18.5,34.42 v17.61,35.31
  Bottom 0.152: U3.46 17.44,16.95 v17.6,17.11 | U2.46 17.74,35.45 v17.61,35.31
S16  (via drill 0.35 pad 0.55)
  Top 0.152: U1.45 17.16,34.95 v17.61,34.51 | U4.45 18.07,17.45 v17.6,17.92 | 4,21.8 7.5,25.3 9.5,25.3
  Top 0.254: v17.6,17.92 17.48,17.92 17,18.4 17,20.3 12,25.3 9.5,25.3 | JP3.16 2.6,21.8 4,21.8
  Route2 0.152: v17.61,34.51 18.2,33.92 18.2,32.8 19.09,31.91 19.09,20.18 17.6,18.69 v17.6,17.92
  Bottom 0.152: U3.45 17.13,17.45 v17.6,17.92 | U2.45 18.05,34.95 v17.61,34.51
S17  (via drill 0.35 pad 0.55)
  Top 0.152: U1.25 9.45,28.95 9.05,28.55 9.05,26.03 v8.88,25.86 | U4.25 28.05,25.03 v28.22,25.2
  Route15 0.254: v28.22,25.2 25.91,22.9 11.59,22.9 8.88,25.61 v8.88,25.86
  Bottom 0.152: U3.25 9.45,25.15 8.88,25.71 v8.88,25.86 | U2.25 28.05,28.95 28.45,28.55 28.45,25.43 v28.22,25.2
  Bottom 0.254: JP3.17 6.1,23.07 v8.88,25.86
S18  (via drill 0.35 pad 0.55)
  Top 0.152: U1.26 9.95,28.95 9.42,28.42 9.42,26.34 v9.69,26.07 | U4.26 27.55,25.67 v27.89,26.01
  Route15 0.254: v27.89,26.01 25.18,23.31 12.32,23.31 9.69,25.93 v9.69,26.07
  Bottom 0.152: U3.26 9.95,25.79 9.67,26.07 | U2.26 27.55,28.95 28.08,28.42 28.08,26.46 27.89,26.27 v27.89,26.01
  Bottom 0.254: 9.67,26.07 | 9.67,26.07 v9.69,26.07 | JP3.18 2.56,24.3 6.4,24.3 8.56,26.46 9.28,26.46 9.67,26.07
S19  (via drill 0.35 pad 0.55)
  Top 0.152: U1.27 10.45,29.02 9.8,28.37 9.8,27.1 v10.05,26.86 | U4.27 27.05,26.31 v27.52,26.79
  Route15 0.254: v27.52,26.79 24.45,23.71 13.05,23.71 10.05,26.72 v10.05,26.86
  Bottom 0.152: U3.27 10.45,26.43 10.03,26.85 | U2.27 27.05,29.02 27.7,28.37 27.7,26.96 v27.52,26.79
  Bottom 0.254: v10.05,26.86 10.03,26.85 9.98,26.9 8.3,26.9 7.01,25.61 JP3.19
S20  (via drill 0.35 pad 0.55)
  Top 0.152: U1.28 10.95,28.97 10.31,28.33 10.31,27.73 v10.43,27.61 | U4.28 26.55,26.95 v27.14,27.54
  Route15 0.254: v27.14,27.54 23.71,24.12 13.79,24.12 10.43,27.47 v10.43,27.61
  Bottom 0.152: U3.28 10.95,27.07 10.43,27.59 v10.43,27.6 v10.43,27.61 | U2.28 26.55,28.97 27.19,28.33 27.19,27.59 v27.14,27.54
  Bottom 0.254: JP3.20 2.62,26.9 7.6,26.9 8.3,27.6 v10.43,27.6
S21  (via drill 0.35 pad 0.55)
  Top 0.152: U4.29 26.05,27.62 v26.53,28.1 | U1.29 11.45,28.58 v11.03,28.16 | v26.53,28.1
  Route15 0.254: v26.53,28.1 26.53,28.03 23.03,24.53 14.49,24.53 11.03,27.99 v11.03,28.16
  Bottom 0.152: U2.29 26.05,28.58 v26.53,28.1 | U3.29 11.45,27.55 11.02,27.98 11.02,28.15
  Bottom 0.254: v11.03,28.16 11.02,28.15 10.86,28.3 10.1,28.3 9.95,28.15 JP3.21
S22  (via drill 0.35 pad 0.55)
  Top 0.152: U4.30 25.55,27.93 v25.73,28.1 | v25.73,28.1 | U1.30 11.95,28.23 11.84,28.11 v11.84,28.1
  Route15 0.254: v25.73,28.1 25.73,28.18 24.61,29.29 12.89,29.29 11.84,28.23 v11.84,28.1
  Bottom 0.152: U2.30 25.55,28.27 v25.73,28.1 | U3.30 11.95,27.97 v11.83,28.09
  Bottom 0.254: v11.83,28.09 v11.84,28.1 11.84,28.21 10.68,29.36 2.54,29.36 JP3.22
S23  (via drill 0.35 pad 0.55)
  Top 0.152: U4.31 25.05,27.96 v24.91,28.11 | U1.31 12.45,28.3 v12.64,28.11
  Route15 0.254: v24.91,28.11 24.91,28.19 24.3,28.8 13.2,28.8 12.64,28.24 v12.64,28.11
  Bottom 0.152: U3.31 12.45,27.93 v12.63,28.11 | U2.31 25.05,28.25 v24.91,28.11
  Bottom 0.254: v12.64,28.11 v12.63,28.11 12.63,28.16 10.93,29.87 4.69,29.87 JP3.23
S24  (via drill 0.35 pad 0.55)
  Top 0.152: U4.32 24.55,27.65 v24.1,28.1 | U1.32 12.95,28.6 v13.45,28.1
  Route15 0.254: v24.1,28.1 23.9,28.3 13.65,28.3 v13.45,28.1
  Bottom 0.152: U2.32 24.55,28.55 v24.1,28.1 | U3.32 12.95,27.6 v13.45,28.1
  Bottom 0.254: v13.45,28.1 13.45,28.25 11.33,30.37 6.15,30.37 4.53,31.99 2.63,31.99 JP3.24
S25  (via drill 0.35 pad 0.55)
  Top 0.152: U1.33 13.45,28.95 14.1,28.3 v14.1,27.6 | U4.33 24.05,26.95 v23.4,27.6
  Route15 0.254: v14.1,27.6 v23.4,27.6
  Bottom 0.152: U3.33 13.45,26.95 v14.1,27.6 | U2.33 24.05,28.95 23.4,28.3 v23.4,27.6
  Bottom 0.254: v14.1,27.6 14.1,28.4 11.62,30.88 6.22,30.88 JP3.25
S26  (via drill 0.35 pad 0.55)
  Top 0.152: U1.34 13.95,29.02 14.66,28.31 14.66,27.37 14.5,27.21 v14.5,26.81 | U4.34 23.55,26.26 v23,26.81
  Route15 0.254: v23,26.81 v14.5,26.81
  Bottom 0.152: U3.34 13.95,26.26 v14.5,26.81 | U2.34 23.55,29.02 22.84,28.31 22.84,27.37 23,27.21 v23,26.81
  Bottom 0.254: JP3.26 2.6,34.5 4.47,34.5 5.09,33.88 5.09,32.76 6.46,31.39 11.71,31.39 14.8,28.3 14.8,27.11 v14.5,26.81
S27  (via drill 0.35 pad 0.55)
  Top 0.152: U1.35 14.45,28.95 15.06,28.34 15.06,26.57 14.8,26.31 v14.8,26.01 | U4.35 23.05,25.66 v22.7,26.01
  Route15 0.254: v22.7,26.01 v14.8,26.01
  Bottom 0.152: U3.35 14.45,25.66 v14.8,26.01 | U2.35 23.05,28.95 22.44,28.34 22.44,26.57 22.7,26.31 v22.7,26.01
  Bottom 0.254: JP3.27 5.6,34.04 5.6,32.83 6.53,31.89 11.81,31.89 15.21,28.49 15.21,26.41 v14.8,26.01
S28  (via drill 0.35 pad 0.55)
  Top 0.152: U1.36 14.95,28.95 15.36,28.54 15.36,25.46 v15.1,25.2 | U4.36 22.55,25.05 v22.4,25.2
  Route15 0.254: v15.1,25.2 v22.4,25.2
  Bottom 0.152: U3.36 14.95,25.05 v15.1,25.2 | U2.36 22.55,28.95 22.14,28.54 22.14,25.46 v22.4,25.2
  Bottom 0.254: JP3.28 2.56,37 4.5,37 6.1,35.4 6.1,32.9 6.6,32.4 11.9,32.4 15.7,28.6 15.7,25.8 v15.1,25.2
S29  (via drill 0.35 pad 0.55)
  Top 0.152: U1.37 17.12,30.95 v17.6,30.47 | U4.37 18.05,21.45 v17.6,21.9
  Route2 0.152: v17.6,21.9 v17.6,30.47
  Bottom 0.152: U3.37 17.15,21.45 v17.6,21.9 | U2.37 18.08,30.95 v17.6,30.47
  Bottom 0.254: v17.6,30.47 17.43,30.47 15.78,32.12 15.78,34.97 12.44,38.31 JP3.29
S30  (via drill 0.35 pad 0.55)
  Top 0.152: U4.38 17.75,20.95 v17.6,21.1 | U1.38 17.43,31.45 v17.6,31.28
  Route2 0.152: v17.6,21.1 18.16,21.65 18.16,30.72 v17.6,31.28
  Bottom 0.152: U3.38 17.45,20.95 v17.6,21.1 | U2.38 17.77,31.45 v17.6,31.28
  Bottom 0.254: JP3.30 2.62,39.6 11.73,39.6 16.19,35.14 16.19,32.51 17.42,31.28 v17.6,31.28
S31  (via drill 0.35 pad 0.55)
  Top 0.152: U4.39 17.76,20.45 v17.61,20.29 | U1.39 17.46,31.95 v17.6,32.09
  Route2 0.152: v17.6,32.09 18.46,31.23 18.46,21.15 v17.61,20.3 v17.61,20.29
  Bottom 0.152: U3.39 17.44,20.45 17.6,20.29 v17.61,20.29 | U2.39 17.74,31.95 v17.6,32.09
  Bottom 0.254: v17.6,32.09 17.41,32.09 16.59,32.91 16.59,35.31 11.05,40.85 JP3.31
S32  (via drill 0.35 pad 0.55)
  Top 0.152: U1.40 17.16,32.45 v17.6,32.89 | U4.40 18.07,19.95 v17.61,19.48
  Route2 0.152: v17.6,32.89 18.78,31.71 18.78,20.67 17.61,19.49 v17.61,19.48
  Bottom 0.152: U3.40 17.13,19.95 17.6,19.48 v17.61,19.48 | U2.40 18.04,32.45 v17.6,32.89
  Bottom 0.254: JP3.32 2.58,42.1 10.5,42.1 17,35.6 17,33.49 v17.6,32.89
SCLK  (via drill 0.35, 0.35 pad 0.55)
  Top 0.152: U4.19 30.25,18.95 v30.6,19.3 | U1.19 7.25,33.45 v6.9,33.1
  Top 0.254: v9.8,8.9 9.8,3.9 v9.6,3.7
  Route2 0.254: v6.9,33.1 11.4,37.6 26.1,37.6 v30.6,33.1 | v30.6,19.3 26.1,14.8 14.04,14.8 9.1,9.86 9.1,9.4 9.6,8.9 v9.8,8.9
  Route15 0.254: v30.6,33.1 29.89,32.39 29.89,19.91 30.5,19.3 v30.6,19.3 | v6.9,33.1 6.9,11.6 9.6,8.9 v9.8,8.9
  Bottom 0.152: U2.19 30.25,33.45 v30.6,33.1 | v9.8,8.9 8.29,8.9 5.86,11.33 5.86,17.46 7.35,18.95 U3.19
  Bottom 0.254: J1.P$5 v9.6,3.7

## Text on the board
tNames: 31 | 1